# Altium PCB ESC.PcbDoc
Units mm, origin at the board's own origin, x right, y up, seen from the top; angles counter-clockwise.
Board outline 48.35 x 28.85 mm, 2 copper layers (Top Layer, Bottom Layer); 3 components, 59 nets, 36 pads, 73 vias.
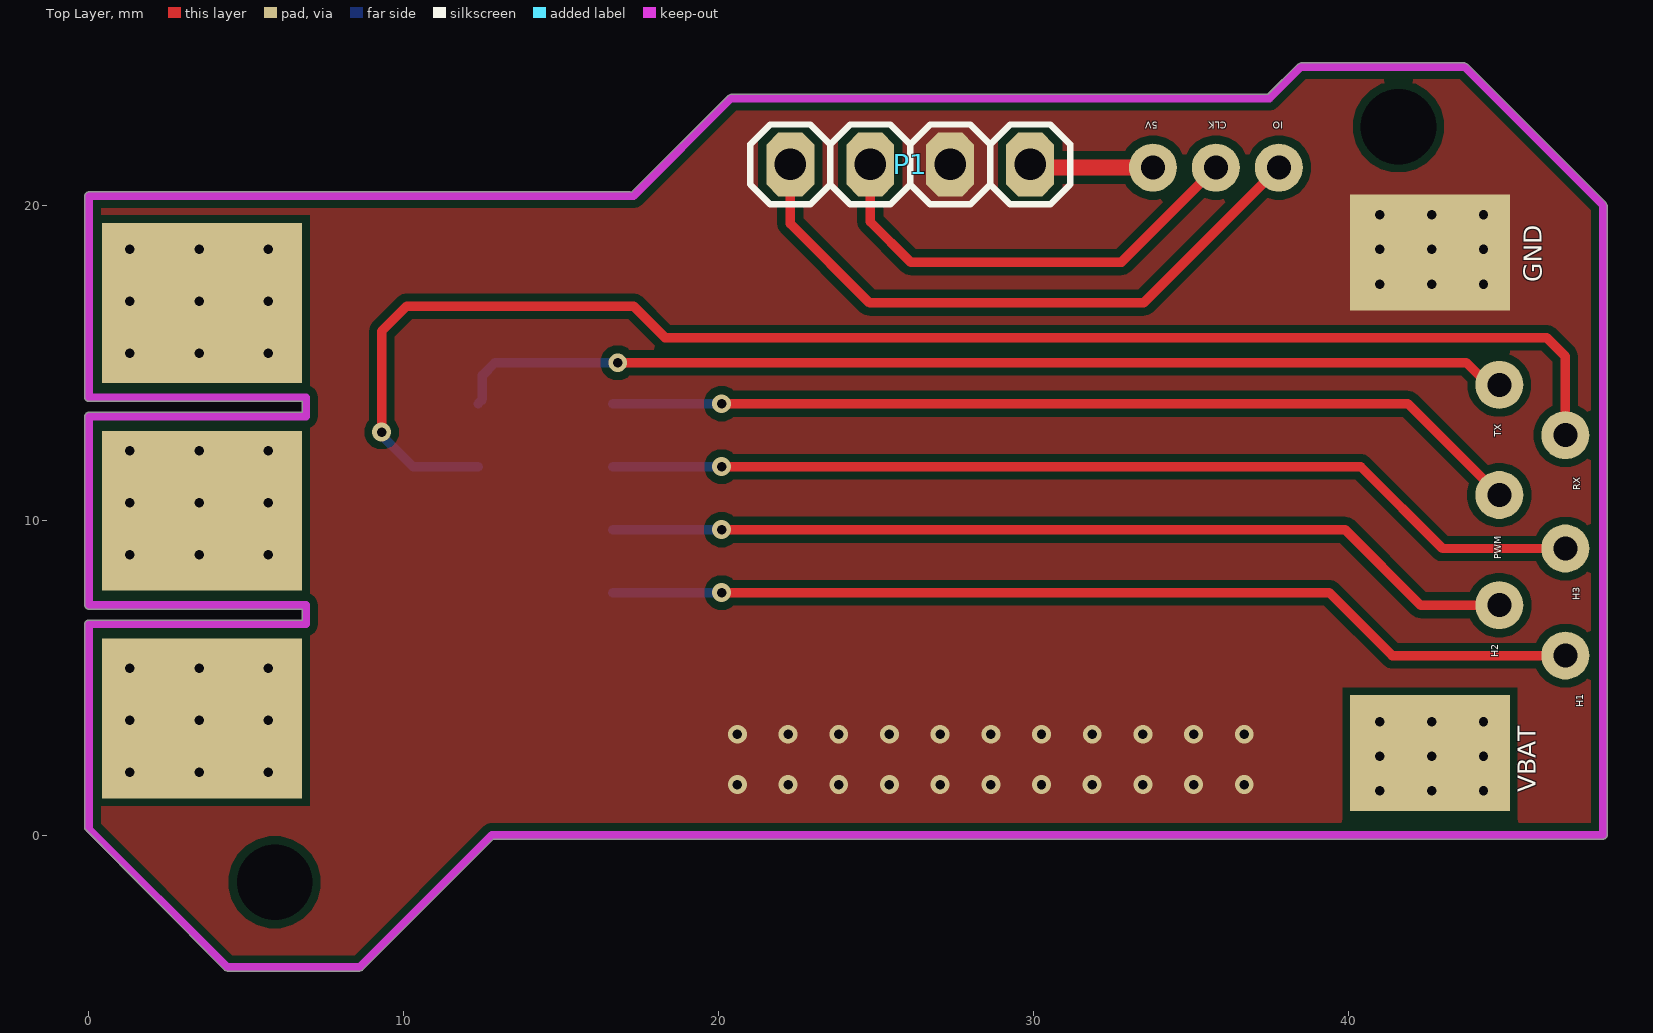
[diagram p0: Top Layer view]
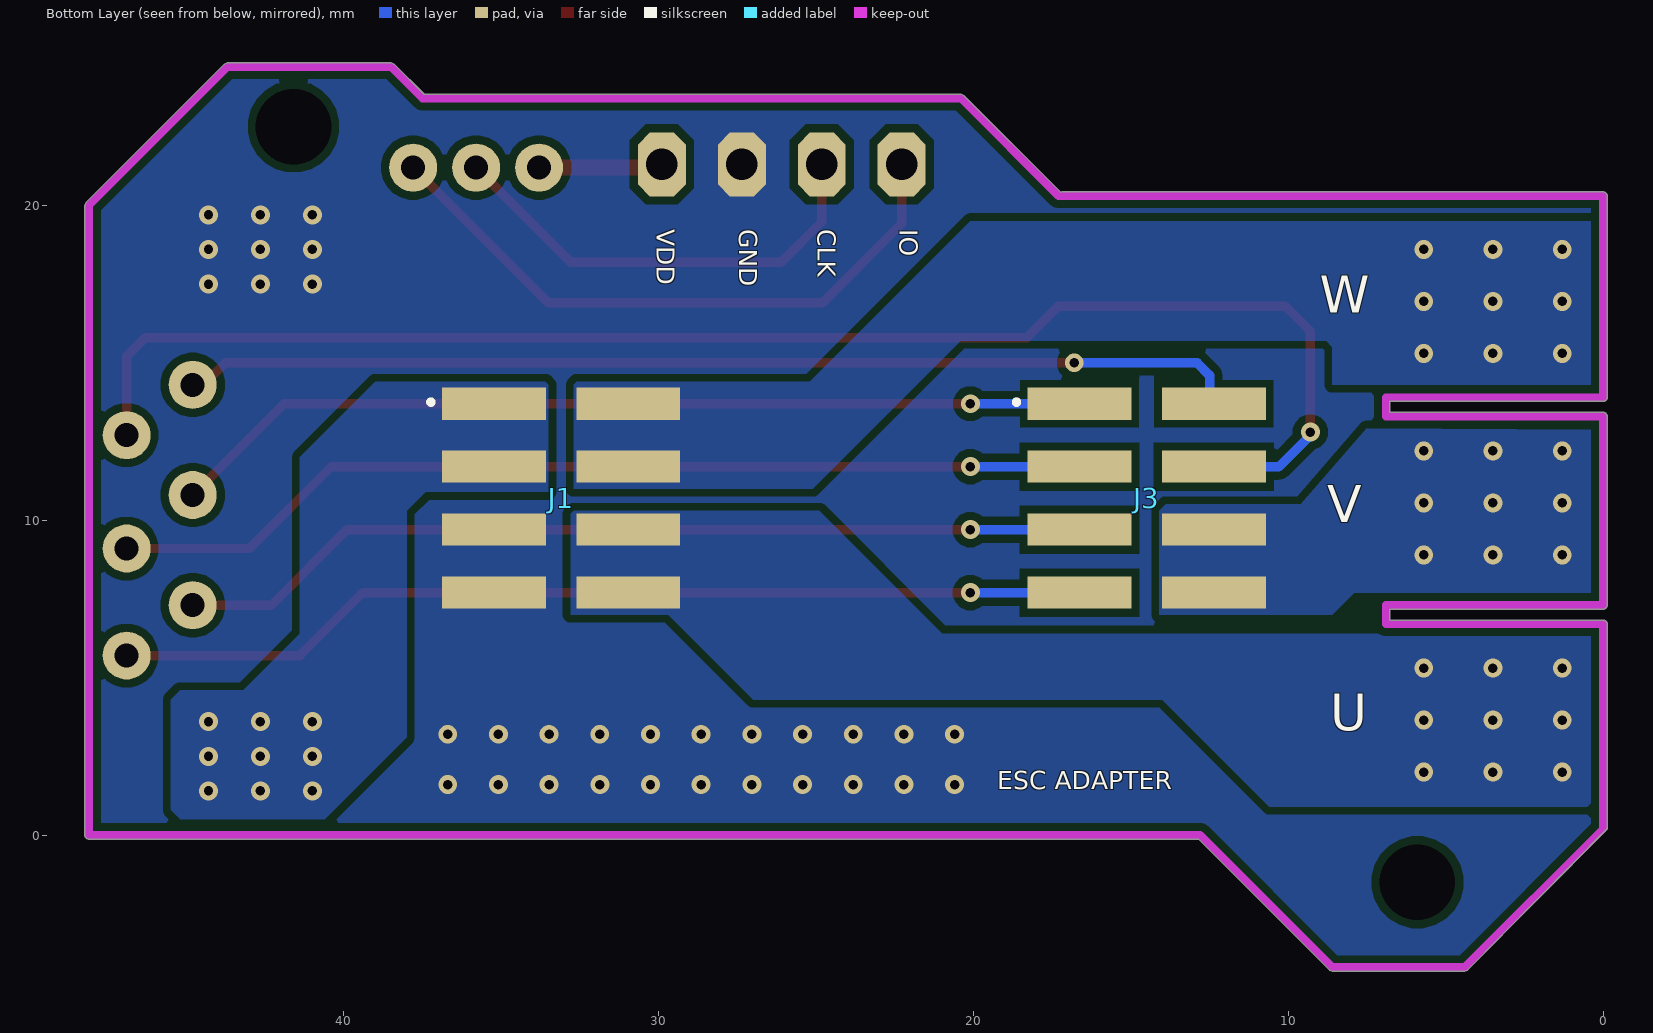
[diagram p1: Bottom Layer view, seen from below]

## Layer stack, top to bottom
Top Solder: solder mask 0.0102, Solder Resist, Dk 3.5
Top Layer: signal copper 0.0356
Dielectric 1: dielectric 0.32, FR-4, Dk 4.8
Bottom Layer: signal copper 0.0356
Bottom Solder: solder mask 0.0102, Solder Resist, Dk 3.5

## Board outline
-0.127,0.2 -0.127,6.7 cw(c0,6.7) 0,6.827 6.773,6.827 6.773,7.173 0,7.173 cw(c0,7.3) -0.127,7.3 -0.127,13.3 cw(c0,13.3) 0,13.427 6.773,13.427 6.773,13.773 0,13.773 cw(c0,13.9) -0.127,13.9 -0.127,20.3 cw(c0,20.3) 0,20.427 17.2,20.427 17.241,20.421 20.31,23.49 20.4,23.527 37.447,23.527 38.41,24.49 38.5,24.527 43.7,24.527 43.79,24.49 48.19,20.09 48.227,20 48.227,0 cw(c48.1,0) 48.1,-0.127 12.853,-0.127 8.69,-4.29 8.6,-4.327 4.4,-4.327 4.31,-4.29

## Design rules (kind name [scope] priority, off if disabled: settings)
Clearance Clearance_7 [All] p1: gap=0.254 ignorepadtopadclearanceinfootprint=FALSE
Clearance Clearance_6 [All] p2: gap=0.254 ignorepadtopadclearanceinfootprint=FALSE
Clearance Clearance_5 [InNamedPolygon('GND_L01_P001')] p3: gap=0.254 ignorepadtopadclearanceinfootprint=FALSE except(0: Arc-Hole Track-Hole SMDPad-Hole THPad-Hole Via-Hole Fill-Hole Poly-Hole Region-Hole Text-Hole)
Clearance Clearance_4 [InNamedPolygon('GND_L01_P001')] p4: gap=5 ignorepadtopadclearanceinfootprint=FALSE
Clearance Clearance_3 [InNamedPolygon('GND_L01_P001')] p5: gap=0.254 ignorepadtopadclearanceinfootprint=FALSE except(0: Arc-Hole Track-Hole SMDPad-Hole THPad-Hole Via-Hole Fill-Hole Poly-Hole Region-Hole Text-Hole)
Clearance new [InNamedPolygon('GND_L02_P000')] p6: gap=5 ignorepadtopadclearanceinfootprint=FALSE
Clearance Clearance_2 [InNamedPolygon('GND_L02_P000')] p7: gap=1 ignorepadtopadclearanceinfootprint=FALSE
Clearance Clearance_1 [InNamedPolygon('GND_L02_P000')] p8: gap=0.1 ignorepadtopadclearanceinfootprint=FALSE
Clearance "top overlay polygon" [InNamedPolygon('GND_L01_P001')] p9: gap=0.5 ignorepadtopadclearanceinfootprint=FALSE
Clearance Clearance_1 [OnMid vs OnMid] p10: gap=0.254 ignorepadtopadclearanceinfootprint=FALSE sourcerule=47 cellrowname=All cellrowtype=0 cellcolname=All cellcoltype=0 innerlayers=TRUE
Clearance Clearance_2 [(ExistsOnLayer('Top Layer') Or ExistsOnLayer('Bottom Layer')) vs (ExistsOnLayer('Top Layer') Or ExistsOnLayer('Bottom Layer'))] p11: gap=0.254 ignorepadtopadclearanceinfootprint=FALSE sourcerule=47 cellrowname=All cellrowtype=0 cellcolname=All cellcoltype=0 outerlayers=TRUE
Clearance [All] p12: gap=0.254 ignorepadtopadclearanceinfootprint=FALSE except(0: Arc-Hole Track-Hole SMDPad-Hole THPad-Hole Via-Hole Fill-Hole Poly-Hole Region-Hole Text-Hole) ismatrix=TRUE
Clearance [All] p13: gap=0.254 ignorepadtopadclearanceinfootprint=FALSE except(0: Arc-Hole Track-Hole SMDPad-Hole THPad-Hole Via-Hole Fill-Hole Poly-Hole Region-Hole Text-Hole)
PlaneClearance [All] p1: clearance=0
PlaneConnect [All] p1: planeconnectstyle=Direct reliefexpansion=0.508 reliefentries=4 reliefconductorwidth=0.254 reliefairgap=0.254
PolygonConnect [All] p1: connectstyle=Direct reliefconductorwidth=0.254 reliefentries=4 polygonreliefangle="90 Angle" airgapwidth=0.254
RoutingVias [All] p1: holewidth=0.711 width=1.27 viastyle="Through Hole" minholewidth=0.711 minwidth=1.27 maxholewidth=0.711 maxwidth=1.27
SolderMaskExpansion SolderMaskExpansion_via [IsVia] p1: expansion=0.102 istentingtop=TRUE useseparateexpansions=TRUE expansionbottom=0.102 istentingbottom=TRUE
SolderMaskExpansion [All] p2: expansion=0.102 istentingtop=FALSE
Width [All] p1: maxlimit=0.254 minlimit=0.254 preferedwidth=0.254
Width Width_1 [All] p2: maxlimit=1 minlimit=0.1 preferedwidth=0.254 minimp=50.000000 maximp=50.000000 favimp=50.000000
28 further rules are at their usual default settings.

## Components (designator, comment, footprint, x,y, rotation, side; value= is the part's Value field where it differs from the comment)
J1 "TMM-104-04-T-D-SM" TMM-104-YY-XX-D-SM 33.1,10.7 r270 bottom
J3 "TMM-104-04-T-D-SM" TMM-104-YY-XX-D-SM 14.5,10.7 r270 bottom
P1 "Header 3" My_1X04 26.09,21.3 r0 top

## Footprints (in the part's own frame and the unit in brackets; to place one, negate y for a bottom-side part, rotate by r counter-clockwise, add the part's x,y. Pads: shape width x height; smd on the part's side, far side on the other; paste and mask are expansions set on the pad)
My_1X04 [mil]
  oct 60x80 hole 39.37: 1(-150,0) 2(-50,0) 3(50,0) 4(150,0)
  silkscreen extent -200,-50 200,50, body extent -200,-49 196,49, height 323
TMM-104-YY-XX-D-SM [mm]
  rect 1.02x3.3 smd: 1(-3,-2.135) 2(-3,2.135) 3(-1,-2.135) 4(-1,2.135) 5(1,-2.135) 6(1,2.135) 7(3,-2.135) 8(3,2.135)
  silkscreen extent -3.1,-4.19 -3,-4.09, body extent -4,-3.53 4,3.53, height 4.7

## Part data
J1 J3: "Connector", Manufacturer_Name=SAMTEC, Datasheet Link=http://suddendocs.samtec.com/prints/tmm-1xx-xx-xx-x-sm-xx-x-mkt.pdf, Manufacturer_Part_Number=TMM-104-04-T-D-SM
P1: library part "Header 4_1", "Header, 4-Pin", ASiD Part Number="Header 4-AS"

## Free pads (board coordinates)
  round 1.524 hole 2.4: 2(5.9,-1.5) 2(41.6,22.5)
  rect 6.35x5.08 smd: 3(3.6,3.7) 4(3.6,10.3) 5(3.6,16.9)
  round 1.524 hole 0.762: 6(46.9,5.7) 7(46.9,12.7) 8(46.9,9.1) 9(44.8,7.3) 10(44.8,10.8) 11(44.8,14.3) 14(37.8,21.2) 15(35.8,21.2) 16(33.8,21.2)
  rect 5.08x3.68 smd: PAD(42.6,18.5) pad2(42.6,2.6)

## Via types
v1: diameter 0.6, hole 0.3, Top Layer to Bottom Layer, tented both sides, 73 vias

## Nets (pads, with @x,y where several pads share a name; then routed paths per layer and width w, separated by ;. In a path a pad name is that pad's centre, name@x,y a point inside that pad or via, vN(x,y) a via of type N, cw(c..) or ccw(c..) an arc to the next point about the centre after c; other vN are vias at no path point)
GND: J1.5 J1.7 P1.3 pad.PAD
  other v1: 20.6,1.6 22.21,1.6 23.82,1.6 25.43,1.6 27.04,1.6 28.65,1.6 30.26,1.6 31.87,1.6 33.48,1.6 35.09,1.6 36.7,1.6 20.6,3.2 22.21,3.2 23.82,3.2 25.43,3.2 27.04,3.2 28.65,3.2 30.26,3.2 31.87,3.2 33.48,3.2 35.09,3.2 36.7,3.2 41,17.5 42.65,17.5 44.3,17.5 41,18.6 42.65,18.6 44.3,18.6 41,19.7 42.65,19.7 44.3,19.7
NetJ1_2: J1.2 J1.4 pad.5
  other v1: 1.3,15.3 3.5,15.3 5.7,15.3 1.3,16.95 3.5,16.95 5.7,16.95 1.3,18.6 3.5,18.6 5.7,18.6
NetJ1_6: J1.6 J1.8 pad.3
  other v1: 1.3,2 3.5,2 5.7,2 1.3,3.65 3.5,3.65 5.7,3.65 1.3,5.3 3.5,5.3 5.7,5.3
NetJ2_2: 
NetJ2_6: 
NetJ3_1: J3.1 pad.10 | length 29.4
  Top Layer w0.3: v1(20.1,13.7) 41.9,13.7 pad.10
  Bottom Layer w0.3: J3.1 v1(20.1,13.7)
NetJ3_2: J3.2 pad.11 | length 33.7
  Top Layer w0.3: v1(16.8,15) 43.756,15 44.456,14.3 pad.11
  Bottom Layer w0.3: J3.2 12.5,13.835 12.5,14.6 12.9,15 v1(16.8,15)
NetJ3_3: J3.3 pad.8 | length 31.3
  Top Layer w0.3: v1(20.1,11.7) 40.4,11.7 43,9.1 pad.8
  Bottom Layer w0.3: J3.3 v1(20.1,11.7)
NetJ3_4: J3.4 pad.7 | length 47.9
  Top Layer w0.3: v1(9.3,12.8) 9.3,16 10.1,16.8 17.3,16.8 18.3,15.8 46.3,15.8 46.9,15.2 pad.7
  Bottom Layer w0.3: v1(9.3,12.8) 9.3,12.7 10.3,11.7 J3.4
NetJ3_5: J3.5 pad.9 | length 29.2
  Top Layer w0.3: v1(20.1,9.7) 39.9,9.7 42.3,7.3 pad.9
  Bottom Layer w0.3: J3.5 v1(20.1,9.7)
NetJ3_6: J3.6 J3.8 pad.4
  other v1: 1.3,8.9 3.5,8.9 5.7,8.9 1.3,10.55 3.5,10.55 5.7,10.55 1.3,12.2 3.5,12.2 5.7,12.2
NetJ3_7: J3.7 pad.6 | length 31.1
  Top Layer w0.3: v1(20.1,7.7) 39.4,7.7 41.4,5.7 pad.6
  Bottom Layer w0.3: J3.7 v1(20.1,7.7)
NetJ4_1: 
NetJ4_2: 
NetJ4_3: 
NetJ4_4: 
NetJ4_5: 
NetJ4_6: 
NetJ4_7: 
NetJ5_2: 
NetJ5_6: 
NetJ6_2: 
NetJ6_6: 
NetJ7_1: 
NetJ7_2: 
NetJ7_3: 
NetJ7_4: 
NetJ7_5: 
NetJ7_6: 
NetJ7_7: 
NetJ8_1: 
NetJ8_2: 
NetJ8_3: 
NetJ8_4: 
NetJ8_5: 
NetJ8_6: 
NetJ8_7: 
NetJ9_2: 
NetJ9_6: 
NetJ10_2: 
NetJ10_4: 
NetJ10_6: 
NetJ10_7: 
NetP1_1: P1.1 pad.14 | length 20.2
  Top Layer w0.3: P1.1 22.28,19.42 24.8,16.9 33.5,16.9 pad.14
NetP1_2: P1.2 pad.15 | length 14.6
  Top Layer w0.3: P1.2 24.82,19.48 26.1,18.2 32.8,18.2 pad.15
NetP1_4: P1.4 pad.16 | length 3.9
  Top Layer w0.254: P1.4 P1.4@30,21.2
  Top Layer w0.5: P1.4@30,21.2 pad.16
NetP2_1: 
NetP2_2: 
NetP2_4: 
NetP3_1: 
NetP3_2: 
NetP3_4: 
NetP4_1: 
NetP4_2: 
NetP4_4: 
NetP5_1: 
NetP5_2: 
NetP5_4: 
VBAT: J1.1 J1.3 pad.pad2
  other v1: 41,1.4 42.65,1.4 44.3,1.4 41,2.5 42.65,2.5 44.3,2.5 41,3.6 42.65,3.6 44.3,3.6

## Polygon pours and split planes (outlines as drawn)
GND on Bottom Layer "GND_L02_P004" (solid, pour order 4): -0.127,0.2 -0.127,6.7 cw(c0,6.7) 0,6.827 6.773,6.827 6.773,7.173 0,7.173 cw(c0,7.3) -0.127,7.3 -0.127,13.3 cw(c0,13.3) 0,13.427 6.773,13.427 6.773,13.773 0,13.773 cw(c0,13.9) -0.127,13.9 -0.127,20.3 cw(c0,20.3) 0,20.427 17.2,20.427 17.241,20.421 20.31,23.49 20.4,23.527 37.447,23.527 38.41,24.49 38.5,24.527 43.7,24.527 43.79,24.49 48.19,20.09 48.227,20 48.227,0 cw(c48.1,0) 48.1,-0.127 12.853,-0.127 8.69,-4.29 8.6,-4.327 4.4,-4.327 4.31,-4.29
NetJ1_6 on Bottom Layer "NETJ1_6_L02_P003" (solid, remove dead copper, pour order 3): 32.8,7 32.8,10.2 32.7,10.3 24.9,10.3 21,6.4 0.3,6.4 0.3,1.1 0.5,0.9 10.6,0.9 14,4.3 27,4.3 29.7,7
NetJ1_2 on Bottom Layer "NETJ1_2_L02_P002" (solid, pour order 2): 32.7,11 32.7,14.3 32.6,14.4 25.2,14.4 20.1,19.5 0.3,19.5 0.3,14.3 8.6,14.3 8.6,15.5 8.8,15.7 20.4,15.7 25.1,11
VBAT on Bottom Layer "VBAT_L02_P001" (solid, pour order 1): 33.5,10.9 33.5,14.3 33.6,14.4 39,14.4 41.4,12 41.4,6.4 43.2,4.6 45.2,4.6 45.5,4.3 45.5,0.8 45.2,0.5 40.6,0.5 38,3.1 38,10.3 37.4,10.9
NetJ3_6 on Bottom Layer "NETJ3_6_L02_P000" (solid, remove dead copper, pour order 0): 14.1,7 14.1,10.3 13.9,10.5 9.6,10.5 7.514,12.914 0.3,12.873 0.3,7.7 7.9,7.7 8.6,7
GND on Top Layer "GND_L01_P005" (solid, pour order 5): -0.127,0.2 -0.127,6.7 cw(c0,6.7) 0,6.827 6.773,6.827 6.773,7.173 0,7.173 cw(c0,7.3) -0.127,7.3 -0.127,13.3 cw(c0,13.3) 0,13.427 6.773,13.427 6.773,13.773 0,13.773 cw(c0,13.9) -0.127,13.9 -0.127,20.3 cw(c0,20.3) 0,20.427 17.2,20.427 17.241,20.421 20.31,23.49 20.4,23.527 37.447,23.527 38.41,24.49 38.5,24.527 43.7,24.527 43.79,24.49 48.19,20.09 48.227,20 48.227,0 cw(c48.1,0) 48.1,-0.127 12.853,-0.127 8.69,-4.29 8.6,-4.327 4.4,-4.327 4.31,-4.29

## Keep-outs
Keep-Out Layer:
  lines w0.254: 43.7,24.4 48.1,20 48.1,0 12.8,0 8.6,-4.2 4.4,-4.2 0,0.2 0,6.7 6.9,6.7 6.9,7.3 0,7.3 0,13.3 6.9,13.3 6.9,13.9 0,13.9 0,20.3 17.2,20.3 17.3,20.3 20.4,23.4 33.1,23.4 33.2,23.4 37.5,23.4 38.5,24.4 43.7,24.4 ; 43.7,24.4 43.7,24.4

## Silkscreen, mask and mechanical layers (free items; w line width, h text height)
Top Overlay:
  text "5V" at 33.946,22.742 h0.38 r180
  text "CLK" at 36.146,22.742 h0.38 r180
  text "IO" at 37.946,22.742 h0.38 r180
  text "GND" at 46.334,17.554 h1 r90
  text "TX" at 44.946,12.654 h0.38 r90
  text "RX" at 47.446,10.954 h0.38 r90
  text "PWM" at 44.946,8.754 h0.38 r90
  text "H3" at 47.442,7.454 h0.38 r90
  text "H2" at 44.846,5.654 h0.38 r90
  text "H1" at 47.546,4.054 h0.38 r90
  text "VBAT" at 46.146,1.354 h1 r90
Bottom Overlay:
  text "IO" at 22.534,19.246 h1 r90
  text "CLK" at 25.135,19.246 h1 r90
  text "GND" at 27.634,19.246 h1 r90
  text "VDD" at 30.246,19.246 h1 r90
  text "W" at 9,16.2 h2
  text "V" at 8.757,9.55 h2
  text "U" at 8.67,2.924 h2
  text "ESC ADAPTER" at 19.246,1.266 h1